# EAGLE board Main (EAGLE 9.6.2)
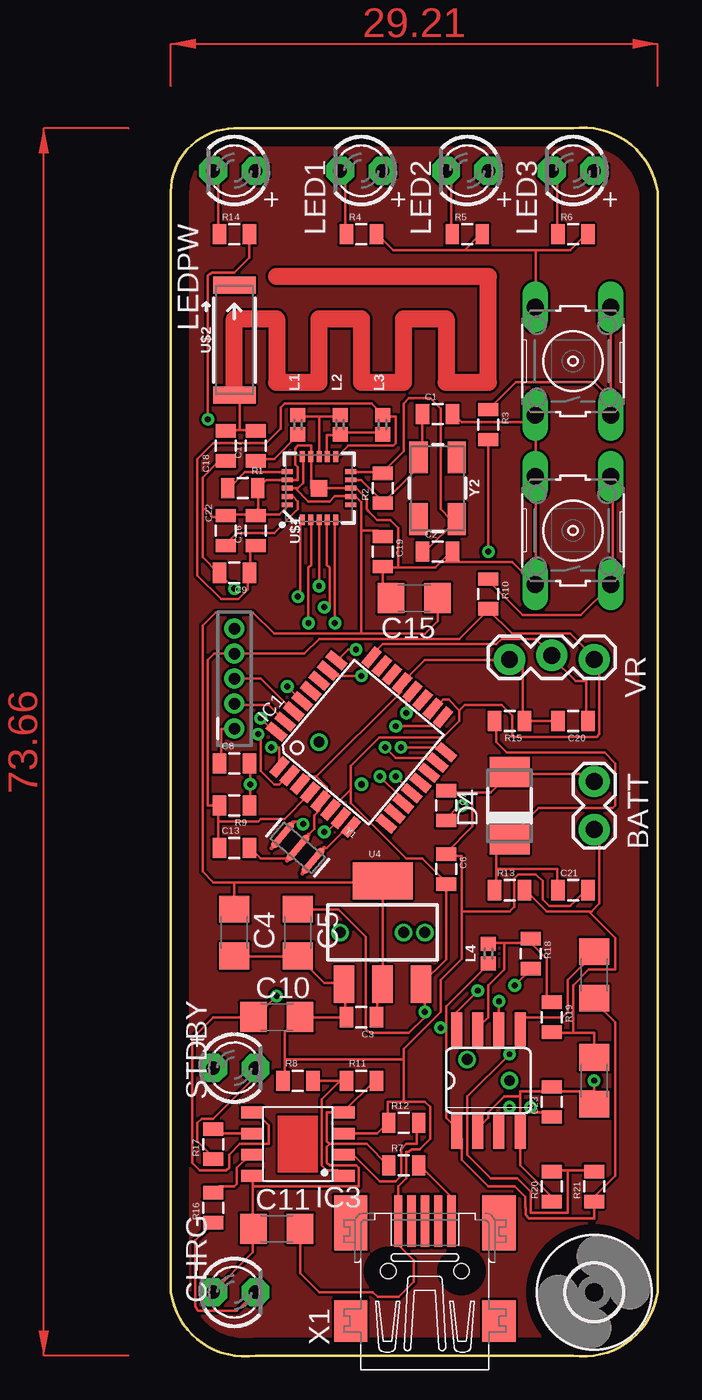
[diagram p0: board, top side]
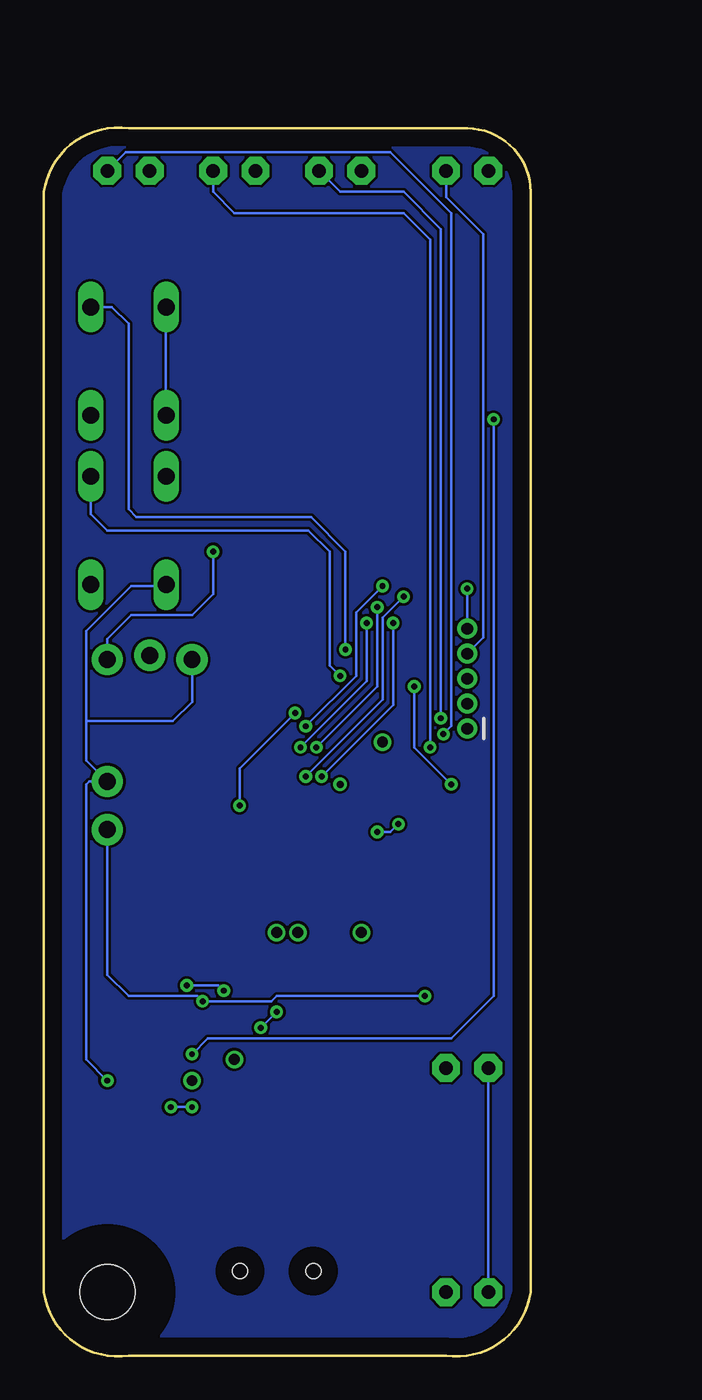
[diagram p1: board, bottom side, seen from below]

Size 29.21 x 73.74 mm. Coordinates in mm from the lower left corner, seen from the top.
Outline: 0,69.89 0,3.85 arc90 5.08,0.04 24.13,0.04 arc90 29.21,3.85 29.21,69.89 arc90 24.13,73.7 3.81,73.7 arc90 0,69.89
Copper layers (1*16): Top 0.035mm / dielectric 1.5mm / Bottom 0.035mm
Design rules "default": minimum track width 6mil, minimum drill 0.35mm, track to track 6mil, track to pad 6mil, pad to pad 6mil, via to via 6mil, smd to smd 6mil, copper to edge 40mil, drill to drill 6mil, minimum pad ring 10mil, minimum via ring 8mil, stop-mask expansion 4mil, vias tented up to drill 0mil, thermal gap 10mil
Net classes: 1 power: width 0.203 mm

## Footprints (pad centres in the part's own frame; a part is rotated, then mirrored left to right if it is on the bottom)
1X02_LOCK = drill 1.016 pad 1.88: 1 -0.178,0; 2 2.718,0
0805 = smd 0.8 x 1.2: 1 -0.9,0; 2 0.9,0
C1206 = smd 1.6 x 1.8: 1 -1.4,0; 2 1.4,0
LED3MM = drill 0.813 pad 1.676 octagon: A -1.27,0; K 1.27,0
DO-214AC = smd 1.8 x 2.4: A 2.025,0; C -2.025,0
3,3 = hole 3.3: 0,0
TQFP32-08 = smd 1.27 x 0.559: 1 -4.293,2.8; 2 -4.293,2; 3 -4.293,1.2; 4 -4.293,0.4; 5 -4.293,-0.4; 6 -4.293,-1.2; 7 -4.293,-2; 8 -4.293,-2.8; 17 4.293,-2.8; 18 4.293,-2; 19 4.293,-1.2; 20 4.293,-0.4; 21 4.293,0.4; 22 4.293,1.2; 23 4.293,2; 24 4.293,2.8 | smd 0.559 x 1.27: 9 -2.8,-4.293; 10 -2,-4.293; 11 -1.2,-4.293; 12 -0.4,-4.293; 13 0.4,-4.293; 14 1.2,-4.293; 15 2,-4.293; 16 2.8,-4.293; 25 2.8,4.293; 26 2,4.293; 27 1.2,4.293; 28 0.4,4.293; 29 -0.4,4.293; 30 -1.2,4.293; 31 -2,4.293; 32 -2.8,4.293
SOP-8 = smd 1.3 x 0.7: 1 -2.75,1.905; 2 -2.75,0.635; 3 -2.75,-0.635; 4 -2.75,-1.905; 5 2.75,-1.905; 6 2.75,-0.635; 7 2.75,0.635; 8 2.75,1.905
PIC_ICSP_MINI_5_PIN = drill 0.7: 1 -3,0; 2 -1.5,0; 3 0,0; 4 1.5,0; 5 3,0
0402 = smd 0.85 x 0.9: 1 -0.58,0; 2 0.58,0
B3F-10XX = drill 1.016 long: 1 -3.251,2.261; 2 3.251,2.261; 3 -3.251,-2.261; 4 3.251,-2.261
SOT223 = smd 1.219 x 2.235: 1 -2.311,-3.099; 2 0,-3.099; 3 2.311,-3.099 | smd 3.6 x 2.2: 4 0,3.099
QFN20-4X4MM = smd 1 x 1: 0 0,0 | smd 0.65 x 0.3: 1 -1.9,1; 2 -1.9,0.5; 3 -1.9,0; 4 -1.9,-0.5; 5 -1.9,-1; 11 1.9,-1; 12 1.9,-0.5; 13 1.9,0; 14 1.9,0.5; 15 1.9,1 | smd 0.3 x 0.65: 6 -1,-1.9; 7 -0.5,-1.9; 8 0,-1.9; 9 0.5,-1.9; 10 1,-1.9; 16 1,1.9; 17 0.5,1.9; 18 0,1.9; 19 -0.5,1.9; 20 -1,1.9
ANT-2.4GHZ-6.5X2.2MM = smd 1.016 x 2.54: FEED -3.302,0; NC 3.302,0
SO08 = smd 0.66 x 2.032: 1 -1.905,-3.073; 2 -0.635,-3.073; 3 0.635,-3.073; 4 1.905,-3.073; 5 1.905,3.073; 6 0.635,3.073; 7 -0.635,3.073; 8 -1.905,3.073
1X03_LOCK = drill 1.016 pad 1.88: 1 0,0.127; 2 2.54,-0.127; 3 5.08,0.127
32005-201 = smd 3.1 x 0.5: 1 3,1.6; 2 3,0.8; 3 3,0; 4 3,-0.8; 5 3,-1.6 | smd 2.5 x 2: M1 -3,-4.45; M2 -3,4.45 | smd 3.3 x 2: M3 2.9,4.45; M4 2.9,-4.45 | hole 0.9: 0,2.2; 0,-2.2
RESONATOR-SMD = smd 0.45 x 1.905: 1 -1.2,0; 2 0,0; 3 1.2,0
CRYSTAL-SMD-5X3.2-4PAD = smd 1.9 x 1.1: 1 -1.85,-1.15; 2 1.85,-1.15; 3 1.85,1.15; 4 -1.85,1.15

## Placement (x,y rotation side)
BATT  [1X02_LOCK]  25.4,31.79 90 top
C1  22p  [0805]  16,56.56 0 top
C2  22p  [0805]  16,48.3 0 top
C3  0.1uF  [0805]  11.43,20.36 180 top
C4  22uF  [C1206]  3.81,25.44 270 top
C5  4.7uF  [C1206]  7.62,25.44 270 top
C6  0.1uF  [0805]  16.51,29.25 270 top
C7  0.1uF  [0805]  16.51,33.06 270 top
C8  0.1uF  [0805]  3.81,35.6 0 top
C9  2.2nF  [0805]  3.81,47.03 180 top
C10  10uF  [C1206]  6.35,20.36 0 top
C11  10uF  [C1206]  6.35,7.66 0 top
C12  0.1mF  [C1206]  25.4,16.55 270 top
C13  0.1uF  [0805]  3.81,30.52 0 top
C14  0.22mF  [C1206]  25.4,22.9 90 top
C15  10uF  [C1206]  14.61,45.51 180 top
C16  4.7p  [0805]  5.08,49.57 90 top
C17  1.5p  [0805]  5.08,54.65 90 top
C18  10p  [0805]  3.3,54.65 270 top
C19  1nF  [0805]  12.7,48.3 270 top
C20  22p  [0805]  24.13,38.14 180 top
C21  0.1  [0805]  24.13,27.98 0 top
C22  1uF  [0805]  3.3,49.57 90 top
C23  1.5nF  [0805]  22.86,15.28 90 top
CHRG  PW  [LED3MM]  3.81,3.85 0 top
D4  SZ105B  [DO-214AC]  20.32,33.06 90 top
H1  MOUNT-HOLE3.3  [3,3]  25.4,3.85 0 top
IC1  MEGA8-AI  [TQFP32-08]  11.43,36.87 50 top
IC3  TP4056  [SOP-8]  7.62,12.74 180 top
J1  PIC_ICSP_MINI_5_PIN  [PIC_ICSP_MINI_5_PIN]  3.81,40.68 90 top
L1  3.9NH  [0402]  7.62,55.92 270 top
L2  8.2NH  [0402]  10.16,55.92 270 top
L3  2.7NH  [0402]  12.7,55.92 270 top
L4  100uH  [0402]  19.05,24.17 90 top
LED1  PW  [LED3MM]  11.43,71.16 180 top
LED2  PW  [LED3MM]  17.78,71.16 180 top
LED3  PW  [LED3MM]  24.13,71.16 180 top
LEDPW  PW  [LED3MM]  3.81,71.16 180 top
R1  1k  [0805]  4.32,52.11 0 top
R2  2k  [0805]  12.7,52.11 90 top
R3  10k  [0805]  19.05,55.92 270 top
R4  330  [0805]  11.43,67.35 0 top
R5  330  [0805]  17.78,67.35 0 top
R6  330  [0805]  24.13,67.35 0 top
R7  2.2k  [0805]  13.97,11.47 0 top
R8  2.2k  [0805]  7.62,16.55 0 top
R9  10k  [0805]  3.81,33.06 180 top
R10  10k  [0805]  19.05,45.76 270 top
R11  2.2k  [0805]  11.43,16.55 0 top
R12  2.2k  [0805]  13.97,14.01 0 top
R13  4.7k  [0805]  20.32,27.98 0 top
R14  1k  [0805]  3.81,67.35 0 top
R15  2.2k  [0805]  20.32,38.14 180 top
R16  102  [0805]  2.54,8.93 90 top
R17  102  [0805]  2.54,12.74 90 top
R18  180  [0805]  21.59,24.17 270 top
R19  0.22  [0805]  22.86,20.36 270 top
R20  2.2K  [0805]  22.86,10.2 90 top
R21  6.8K  [0805]  25.4,10.2 90 top
S1  SW1  [B3F-10XX]  24.13,59.73 90 top
S2  SW2  [B3F-10XX]  24.13,49.57 90 top
STDBY  PW  [LED3MM]  3.81,17.31 0 top
U4  LM1117 3.3  [SOT223]  12.7,25.44 0 top
U$1  NRF24L01SMD  [QFN20-4X4MM]  8.89,52.11 90 top
U$2  2.45GHz  [ANT-2.4GHZ-6.5X2.2MM]  3.81,61 90 top
U$3  MC33063/MC34063D  [SO08]  19.05,16.55 0 top
VR  [1X03_LOCK]  25.4,41.95 180 top
X1  MINI-USB-32005-201  [32005-201]  15.24,5.12 90 top
Y1  16MHZ  [RESONATOR-SMD]  7.62,30.52 320 top
Y2  [CRYSTAL-SMD-5X3.2-4PAD]  16,52.11 270 top

## Library data of the parts
BATT VR = SparkFun
C1-C3 C6-C9 C13 C16-C23 = SparkFun-Passives
C4 C5 C10-C12 C14 C15 CHRG LED1-LED3 LEDPW STDBY U$3 = adafruit
D4 = diode
H1 = holes
IC1 = atmel; MPN: ATMEGA8-16AU; OC_FARNELL: 9171371; OC_NEWARK: 73M8863
IC3 = TP4056
J1 = SparkFun-Connectors; PROD_ID: CONN-08314; SF_ID: PRT-11264
L1-L4 = SparkFun-Coils; PROD_ID: NDUC-13457
R1-R21 = SparkFun-Resistors
S1 S2 = switch-omron; MPN: B3F-1000; OC_FARNELL: 176432; OC_NEWARK: 36M3542
U4 = SparkFun-PowerIC; PROD_ID: VREG-08170
U$1 = SparkFun-RF; PROD_ID: IC-08950; SF_ID: COM-00690
U$2 = SparkFun-RF; PROD_ID: ANT-08187; SF_ID: WRL-00144
X1 = con-cypressindustries; OC_FARNELL: unknown; OC_NEWARK: unknown
Y1 = SparkFun-FreqCtrl; PROD_ID: XTAL-08900
Y2 = SparkFun-Clocks

## Nets
3.3V: C3.1 C4.1 C15.1 C19.1 U4.2 U4.4 U$1.7 U$1.15 U$1.18
A0: C21.1 D4.C R13.1 R15.2
A1: C20.1 IC1.24 VR.2
A2: IC1.25 R3.1 S1.3 S1.4
A3: IC1.26 R10.1 S2.3 S2.4
BATT_IN: BATT.1 C10.1 C12.1 IC3.5 R13.2 R19.2 U$3.6
CS: IC1.14
D2: IC1.32 LED1.A
D3: IC1.1 LED2.A
D4: IC1.2 LED3.A
D5: IC1.9
D6: IC1.10
D7: IC1.11 U$1.2
D8: IC1.12 U$1.1
D9: IC1.13
GND: BATT.2 C1.2 C2.2 C3.2 C4.2 C5.2 C6.1 C7.1 C9.2 C10.2 C11.2 C12.2 C13.2 C15.2 C16.2 C18.2 C19.2 C20.2 C21.2 C22.2 C23.2 D4.A IC1.3 IC1.5 IC1.21 IC3.3 J1.5 R1.2 R4.2 R5.2 R6.2 R8.1 R12.1 R15.1 R20.1 S1.1 S1.2 S2.1 S2.2 U4.1 U$1.0 U$1.8 U$1.14 U$1.17 U$1.20 U$3.2 U$3.4 VR.3 X1.1 Y1.2
IRQ: U$1.6
MISO: IC1.16 U$1.5
MOSI: IC1.15 U$1.4
N$1: LED1.K R4.1
N$2: LED2.K R5.1
N$3: LED3.K R6.1
N$4: C17.1 L1.2
N$5: IC1.8 Y1.3
N$7: IC1.7 Y1.1
N$8: C7.2 IC1.20
N$9: C8.1 J1.1
N$11: IC1.23
N$12: LEDPW.K R14.1
N$13: IC3.7 R16.2
N$14: L1.1 L2.1 U$1.13
N$15: L2.2 L3.2 U$1.12
N$16: C9.1 C16.1 L3.1 U$1.11
N$17: C22.1 U$1.19
N$18: R1.1 U$1.16
N$19: C17.2 C18.1 U$2.FEED
N$20: C1.1 R2.1 U$1.9 Y2.1
N$21: C2.1 R2.2 U$1.10 Y2.3
N$22: IC3.6 R17.2
N$23: R17.1 STDBY.K
N$24: CHRG.K R16.1
N$25: C11.1 CHRG.A IC3.4 IC3.8 R7.1 R11.2 STDBY.A
N$26: C14.2 R14.2 R20.2 R21.2 U$3.5
N$27: IC3.2 R12.2
N$28: C23.1 U$3.3
N$29: IC3.1 R8.2 R11.1
N$30: R7.2 X1.5
N$34: R18.2 U$3.8
N$35: L4.2 R18.1 R19.1 U$3.7
RST: C8.2 IC1.29 R9.1
RXD: IC1.30 J1.3
SCK: IC1.17 U$1.3
SCL: IC1.28
SDA: IC1.27
TXD: IC1.31 J1.2
VCC: C5.1 C6.2 C13.1 C14.1 IC1.4 IC1.6 IC1.18 J1.4 L4.1 LEDPW.A R3.2 R9.2 R10.2 R21.1 U4.3 U$3.1 VR.1

## Tracks (layer width: path | path; a pad name or v marks a point on that pad's centre or on a via)
3.3V
  Top 0.152: 7.46,52.11 7.62,52.11 7.94,52.43 7.94,53.86 U$1.15 | 7.46,52.11 U$1.18 | 7.46,52.11 8.26,51.32 9.53,51.32 9.84,51.63 10.64,51.63 U$1.7 11.09,51.61 11.43,51.27 11.43,49.57 | C19.1 12.7,49.25 12.38,49.57 11.43,49.57 | 15.88,45.44 C15.1 16,44.13 15.24,43.37 15.09,43.37 15.08,43.38 11.43,43.38 | C3.1 12.38,20.36 12.38,22.27 12.7,22.27 U4.2 12.7,28.46 | 12.7,28.46 3.81,28.46 | 3.81,26.87 C4.1 3.81,28.46 | 12.7,28.46 U4.4 | 3.81,28.46 2.54,28.46 1.91,29.09 1.91,43.86 2.7,44.65 4.92,44.65 6.19,43.38 11.43,43.38 | 11.43,49.57 11.43,43.38
A0
  Top 0.152: 19.53,29.25 19.53,31 20.32,31 D4.C 20.32,31.16 22.07,32.9 26.51,32.9 26.67,33.06 26.67,35.6 26.04,36.24 20.16,36.24 19.53,36.87 19.53,38.14 R15.2 | 19.53,29.25 19.53,27.98 R13.1 | C21.1 23.18,27.98 23.18,29.25 19.53,29.25
A1
  Top 0.152: C20.1 24.92,38.14 24.92,40.52 24.29,40.52 22.86,41.95 VR.2 22.86,42.11 21.91,43.06 19.84,43.06 19.53,42.74 12.7,42.74 12.06,42.11 IC1.24
A2  (via drill 0.35)
  Top 0.152: 19.05,56.87 R3.1 20.69,58.46 25.4,58.46 26.35,57.51 26.35,56.56 S1.3 S1.4 26.35,62.91 | v11.11,42.43 10.64,42.43 10,41.79 IC1.25
  Bottom 0.152: v11.11,42.43 11.11,48.3 13.18,50.36 23.65,50.36 24.13,50.84 24.13,61.99 25.12,62.98 S1.4
A3  (via drill 0.35)
  Top 0.152: R10.1 19.05,46.55 21.11,44.49 24.61,44.49 26.35,46.24 S2.3 26.51,46.4 26.51,52.75 S2.4 | v11.43,40.84 9.84,40.84 9.53,41.16 IC1.26
  Bottom 0.152: S2.4 26.39,50.56 25.4,49.57 13.33,49.57 12.06,48.3 12.06,41.47 v11.43,40.84
B
  pour Bottom: 0,69.89 arc-90 3.81,73.7 25.4,73.7 arc-90 29.21,69.89 29.21,3.85 arc-90 25.4,0.04 3.81,0.04 arc-90 0,3.85
BATT_IN  (via drill 0.35)
  Top 0.152: 25.08,26.71 25.24,26.71 25.72,27.19 25.72,31.47 25.4,31.47 BATT.1 | 25.08,26.71 22.54,26.71 21.27,27.98 R13.2 | v6.35,21.63 5.08,20.36 C10.1 2.54,20.36 1.27,19.09 1.27,11.63 1.75,11.15 3.33,11.15 3.49,11.31 3.49,12.11 4.13,12.74 5.87,12.74 5.87,13.85 5.08,14.65 IC3.5 | 24.13,19.41 25.4,19.41 C12.1 | 24.13,19.41 22.86,19.41 R19.2 | v19.68,21.31 U$3.6 | 24.13,19.41 24.13,22.27 25.08,23.22 26.67,23.22 26.67,25.12 25.08,26.71
  Bottom 0.152: v6.35,21.63 15.24,21.63 15.56,21.31 v19.68,21.31 20,21.63 24.13,21.63 25.4,22.9 BATT.1
D2  (via drill 0.35)
  Top 0.152: v5.4,38.3 6.19,37.51 IC1.32
  Bottom 0.152: v5.4,38.3 5.4,67.67 7.62,69.89 11.43,69.89 LED1.A
D3  (via drill 0.35)
  Top 0.152: v6.03,36.55 6.51,36.55 6.51,35.44 IC1.1
  Bottom 0.152: v6.03,36.55 6.03,67.03 7.62,68.62 17.78,68.62 19.05,69.89 LED2.A
D4  (via drill 0.35)
  Top 0.152: v5.24,37.35 5.4,37.35 5.4,35.12 6.19,34.33 6.51,34.33 6.98,34.81 IC1.2
  Bottom 0.152: v5.24,37.35 4.76,37.82 4.76,68.62 8.41,72.27 24.29,72.27 LED3.A
D7  (via drill 0.35)
  Top 0.152: v8.26,44.01 8.26,47.35 8.41,47.51 8.41,50.21 U$1.2 | v12.54,34.81 13.81,33.54 13.81,33.22 IC1.11
  Bottom 0.152: v8.26,44.01 8.26,39.09 v12.54,34.81
D8  (via drill 0.35)
  Top 0.152: v7.62,45.6 7.78,45.6 7.78,50.21 U$1.1 | v13.49,34.81 14.45,33.85 IC1.12
  Bottom 0.152: v7.62,45.6 8.89,44.33 8.89,39.41 v13.49,34.81
GND  (via drill 0.35)
  Top 0.152: 5.24,52.11 5.71,52.59 6.98,52.59 U$1.17 7.14,52.59 7.62,52.59 7.62,53.38 7.46,53.54 7.46,54.49 7.62,54.65 8.41,54.65 8.41,54.02 U$1.14 8.41,53.86 8.41,52.11 U$1.0 U$1.8 11.11,52.11 11.75,51.48 11.75,50.84 11.87,50.72 12.38,50.21 13.18,50.21 13.65,49.73 13.65,47.35 | 5.08,50.52 5.24,50.52 | 5.24,50.52 6.51,50.52 6.98,51 U$1.20 | 5.24,50.52 5.24,52.11 | 5.24,52.11 R1.2 | 5.24,50.52 C16.2 5.08,50.52 | 2.86,47.03 1.91,47.98 1.91,50.84 | C18.2 3.17,53.7 2.86,53.7 1.91,52.75 1.91,50.84 | 2.86,47.03 v3.81,46.08 | 2.86,47.03 C9.2 | 5.08,50.52 3.33,50.52 C22.2 3.17,50.36 2.54,50.36 2.06,50.84 1.91,50.84 | 17.62,66.4 13.33,66.4 12.38,67.35 R4.2 | 17.62,66.4 18.57,67.35 R5.2 | 17.62,66.4 21.91,66.4 | 21.91,66.4 23.97,66.4 24.92,67.35 R6.2 | 21.91,66.4 21.91,63.06 S1.2 | C1.2 16.99,56.56 17.46,56.08 21.75,56.08 21.87,55.96 | 12.7,47.35 12.7,45.6 13.18,45.6 C15.2 | 16.19,47.67 15.88,47.35 13.65,47.35 | 16.19,47.67 16.83,48.3 C2.2 | 12.7,47.35 13.65,47.35 | 12.7,47.35 C19.2 | 16.19,47.67 20.48,47.67 21.75,46.4 S2.1 21.91,46.4 21.91,52.75 S2.2 21.91,52.9 21.91,55.92 21.87,55.96 | 13.65,7.98 13.65,6.69 14.58,5.76 14.58,4.48 13.68,3.58 12.4,3.58 12.13,3.85 8.89,3.85 7.75,4.99 C11.2 7.78,7.66 | 13.65,7.98 X1.1 13.65,8.14 | 7.62,24.01 3.81,24.01 C4.2 | 10.48,20.36 10.48,22.27 U4.1 10.32,22.42 9.21,22.42 7.62,24.01 | 13.02,14.01 12.38,13.38 IC3.3 | 6.83,17.82 6.83,19.44 C10.2 10.48,20.36 | 6.83,17.82 6.83,16.55 R8.1 | 13.02,14.01 13.02,15.28 13.97,15.28 | 13.02,14.01 R12.1 | 10.48,20.36 C3.2 | 7.62,24.01 C5.2 | 13.65,8.14 13.65,10.2 14.13,10.68 14.13,12.26 14.29,12.26 14.45,12.42 14.92,12.42 15.56,13.06 15.56,14.96 15.24,15.28 13.97,15.28
  Top 0.152: 18.1,33.85 18.1,31.79 16.51,30.2 C6.1 16.51,30.04 17.46,30.04 17.46,26.71 | 18.1,33.85 16.51,33.85 C7.1 | C21.2 24.92,27.98 23.97,27.03 22.7,27.03 22.3,27.42 22.3,28.54 21.91,28.93 20.85,28.93 20.59,28.68 20.59,26.98 20.32,26.71 17.46,26.71 | 20.32,34.97 19.21,33.85 18.1,33.85 | 20.32,34.97 25.08,34.97 25.4,34.65 BATT.2 | 20.32,34.97 D4.A | C13.2 4.76,30.52 5.4,29.89 6.98,29.89 Y1.2 8.24,31.29 | IC1.5 8.89,33.22 8.89,32.77 8.6,32.48 8.6,31.66 8.24,31.29 | 8.26,31.31 8.24,31.29 | 8.73,34.81 8.1,34.81 7.78,34.49 IC1.3 | 8.73,34.81 9.37,34.17 9.37,33.71 IC1.5 | 9.05,33.38 IC1.5 | C20.2 R15.1 21.11,38.14 21.11,41.79 20.32,41.79 | 20.32,41.79 15.24,41.79 13.97,40.52 IC1.21 13.81,40.36 13.81,39.89 8.73,34.81 | 20.32,41.79 VR.3 | 17.46,26.71 17.46,23.85 16.19,22.58 16.19,20.68 13.97,18.46 13.97,17.82 | 25.4,15.92 22.86,15.92 | 25.4,15.92 C12.2 25.4,15.28 | R20.1 22.86,9.57 20.95,11.47 U$3.4 20.95,15.6 | 20.95,15.6 20,15.6 19.05,14.65 19.05,14.33 18.41,13.69 U$3.2 | 22.86,15.92 20.95,15.92 20.95,15.6 | 22.86,15.92 C23.2 | v25.4,16.55 25.4,15.92 | S1.1 21.87,55.96 | 13.65,7.98 13.65,8.14 | 13.97,15.28 13.97,17.82 | 6.83,17.82 13.97,17.82
  Bottom 0.152: v3.81,46.08 J1.5 | S1.2 21.91,62.91 21.91,56.56 S1.1 | 26.67,38.14 26.67,35.78 BATT.2 26.49,34.51 26.67,34.33 26.67,17.82 v25.4,16.55 | 26.67,38.14 26.67,43.54 23.97,46.24 21.91,46.24 S2.1 | VR.3 20.32,39.28 21.46,38.14 26.67,38.14
MISO  (via drill 0.35)
  Top 0.152: v9.84,44.01 9.84,50.21 U$1.5 | v13.81,36.55 16.35,36.55 16.51,36.39 IC1.16
  Bottom 0.152: v9.84,44.01 9.84,40.52 v13.81,36.55
MOSI  (via drill 0.35)
  Top 0.152: v9.21,44.97 9.53,44.97 9.53,47.35 9.37,47.51 9.37,50.21 U$1.4 | v12.86,36.55 13.49,35.92 15.72,35.92 15.88,35.76 IC1.15
  Bottom 0.152: v9.21,44.97 9.21,40.2 v12.86,36.55
N$1
  Top 0.152: LED1.K 10.48,71.16 10.48,67.35 R4.1
N$2
  Top 0.152: LED2.K 16.83,71.16 16.83,67.35 R5.1
N$3
  Top 0.152: LED3.K 23.18,71.16 23.18,67.35 R6.1
N$4
  Top 0.152: L1.2 7.62,55.29 6.19,53.86 5.08,53.86 C17.1
N$5
  Top 0.152: 10.57,31.78 IC1.8 10.64,31.79 9.37,30.52 9.21,30.52 Y1.3
N$7  (via drill 0.35)
  Top 0.152: 7.32,31.91 Y1.1 7.46,32.11 7.78,32.11 v7.94,31.95 | v9.21,31.47 9.37,31.47 10.16,32.27 IC1.7
  Bottom 0.152: v9.21,31.47 8.41,31.47 v7.94,31.95
N$8  (via drill 0.35)
  Top 0.152: v17.46,33.06 17.3,33.06 16.51,32.27 C7.2 | IC1.20 14.13,39.53 v14.13,38.62
  Bottom 0.152: v17.46,33.06 17.46,35.28 v14.13,38.62
N$9
  Top 0.152: C8.1 3.02,35.6 3.02,37.66 3.81,37.66 J1.1
N$12
  Top 0.152: LEDPW.K 2.86,71.16 2.86,67.35 R14.1
N$13
  Top 0.152: IC3.7 4.76,12.11 3.97,11.31 3.97,10.36 3.81,10.2 2.91,10.2 R16.2
N$14
  Top 0.152: 8.89,56.4 U$1.13 | 8.89,56.4 7.62,56.4 L1.1 | 8.89,56.4 10.16,56.4 L2.1
N$15
  Top 0.152: U$1.12 9.37,54.02 9.37,55.29 10.16,55.29 L2.2 10.16,55.44 12.7,55.44 L3.2
N$16
  Top 0.152: C16.1 5.08,48.62 4.76,48.62 4.76,47.03 C9.1 4.6,47.03 4.6,46.01 4.03,45.44 3.02,45.44 1.59,46.87 1.59,53.86 2.54,54.81 5.71,54.81 6.59,55.68 6.59,56.95 6.83,57.19 12.06,57.19 12.7,56.56 L3.1 12.7,56.4 13.49,56.4 13.49,54.81 13.33,54.65 10.64,54.65 10,54.02 U$1.11
N$17
  Top 0.152: U$1.19 7.14,51.63 7.3,51.63 7.62,51.32 7.62,50.84 6.19,49.41 3.97,49.41 3.33,48.78 C22.1
N$18
  Top 0.152: U$1.16 6.98,53.06 4.45,53.06 3.49,52.11 R1.1
N$19
  Top 0.152: 4.13,55.6 5.08,55.6 C17.2 | 4.13,55.6 3.33,55.6 C18.1 | 4.13,55.6 4.13,57.35 U$2.FEED
  Top 1.016: U$2.FEED 3.81,62.27 6.35,62.27 6.35,58.46 8.89,58.46 8.89,62.27 11.43,62.27 11.43,58.46 13.97,58.46 13.97,62.27 16.51,62.27 16.51,58.46 19.05,58.46 19.05,64.81 6.35,64.81
N$20
  Top 0.152: 12.54,51.48 12.7,51.32 R2.1 | 12.54,51.48 11.43,52.59 10.79,52.59 U$1.9 | 15.08,54.02 15.08,56.56 C1.1 | 15.08,54.02 14.92,54.02 Y2.1 14.92,53.86 | 12.54,51.48 R2.1 | R2.1 13.6,52.11 | 15.08,54.02 15.08,53.59 R2.1
N$21
  Top 0.152: 12.7,53.06 10.79,53.06 U$1.10 | C2.1 15.24,48.3 17.14,50.21 Y2.3 16.77,50.26 16.19,50.84 16.19,56.87 15.56,57.51 14.29,57.51 13.97,57.19 13.97,54.33 12.7,53.06 | 12.7,53.06 R2.2
N$22
  Top 0.152: IC3.6 2.7,13.38 2.54,13.53 R17.2
N$23
  Top 0.152: R17.1 2.54,11.95 1.59,12.9 1.59,14.01 1.84,14.27 2.54,14.27 5.08,16.81 STDBY.K
N$24
  Top 0.152: R16.1 1.47,6.96 1.47,3.02 1.52,2.92 1.6,2.79 1.65,2.74 3.97,2.74 CHRG.K
N$25
  Top 0.152: 9.53,12.74 11.75,12.74 13.02,11.47 R7.1 | 9.53,12.74 9.37,12.9 9.37,14.65 10.32,14.65 | 10.32,14.65 12.22,16.55 R11.2 | 10.32,14.65 IC3.4 | 4.92,7.66 4.92,10.2 | 4.92,10.2 4.92,10.84 IC3.8 | 4.92,7.66 C11.1 | 9.53,12.74 9.37,12.58 9.37,11.63 9.53,11.47 11.11,11.47 11.27,11.31 11.27,10.2 4.92,10.2 | 4.92,7.66 4.92,6.23 CHRG.A
  Bottom 0.152: CHRG.A STDBY.A
N$26  (via drill 0.35)
  Top 0.152: 23.81,11.15 25.4,11.15 R21.2 | 23.81,11.15 22.86,11.15 R20.2 | C14.2 25.4,24.17 23.81,22.58 23.81,20.68 23.5,20.36 20.95,20.36 U$3.5 20.95,18.77 v20.32,18.14 17.78,15.6 17.78,12.11 19.21,10.68 20.8,10.68 21.59,9.88 21.59,8.61 23.81,8.61 23.81,11.15 | v2.22,56.24 2.22,64.86 2.35,65 2.4,65 2.45,65.04 2.54,65.04 3.81,65.04 4.71,65.94 R14.2
  Bottom 0.152: v2.22,56.24 2.22,21.63 4.76,19.09 19.37,19.09 v20.32,18.14
N$27
  Top 0.152: IC3.2 10.95,12.11 12.54,10.52 13.49,10.52 13.81,10.84 13.81,12.42 14.13,12.74 14.76,12.74 14.76,14.01 R12.2
N$28  (via drill 0.35)
  Top 0.152: v21.59,14.96 21.59,14.65 22.86,14.65 C23.1 | v20.32,14.96 19.68,14.33 U$3.3
  Bottom 0.152: v20.32,14.96 v21.59,14.96
N$29
  Top 0.152: R11.1 10.16,16.55 | 10.16,16.55 9.05,16.55 R8.2 | IC3.1 10.32,10.84 10,11.15 9.37,11.15 9.05,11.47 9.05,15.28 9.05,15.44 10.16,16.55
N$30
  Top 0.152: R7.2 14.92,11.47 16.83,9.57 16.83,8.14 X1.5
N$34  (via drill 0.35)
  Top 0.152: v20.64,22.27 21.59,23.22 R18.2 | v18.41,21.95 17.14,20.68 U$3.8
  Bottom 0.152: v18.41,21.95 18.73,22.27 v20.64,22.27
N$35
  Top 0.152: 21.59,24.81 20,24.81 | 20,24.81 19.05,24.81 L4.2 | 21.59,24.81 22.54,23.85 22.54,21.63 22.86,21.31 R19.1 | 21.59,24.81 R18.1 | 20,24.81 20,23.22 19.05,22.27 19.05,20.36 18.41,19.73 U$3.7
N$36  (via drill 0.65)
  other vias: 17.78,17.82
N$37  (via drill 0.65)
  other vias: 20.32,16.55
N$38  (via drill 0.65)
  other vias: 10.16,25.44
N$39  (via drill 0.65)
  other vias: 15.24,25.44
N$40  (via drill 0.65)
  other vias: 13.97,25.44
N$41  (via drill 0.65)
  other vias: 8.89,36.87
N$42  (via drill 0.4)
  other vias: 11.43,34.33
RST  (via drill 0.35)
  Top 0.152: R9.1 4.76,33.06 v4.76,34.33 4.76,35.6 C8.2 | v6.98,40.2 7.78,39.41 IC1.29
  Bottom 0.152: v6.98,40.2 6.98,36.55 v4.76,34.33
RXD
  Top 0.152: J1.3 5.4,40.68 7.3,38.78 IC1.30
SCK  (via drill 0.35)
  Top 0.152: v8.89,46.24 U$1.3 | v13.49,37.82 15.72,37.82 16.19,38.3 IC1.17
  Bottom 0.152: v8.89,46.24 10.48,44.65 10.48,40.84 v13.49,37.82
T
  pour Top: 0,69.89 arc-90 3.81,73.7 24.13,73.7 25.4,73.7 arc-90 29.21,69.89 29.21,5.12 29.21,3.85 arc-90 25.4,0.04 3.81,0.04 2.54,0.04 arc-90 0,2.58
TXD
  Top 0.152: IC1.31 6.83,38.14 5.87,39.09 3.81,39.09 J1.2
VCC  (via drill 0.35)
  Top 0.152: 10,33.22 9.68,32.9 IC1.6 10,33.22 10.79,34.02 | 10.79,33.22 11.19,32.82 14.13,29.89 15.08,29.89 16.51,28.46 C6.2 16.51,23.84 U4.3 15.08,22.42 15.24,22.42 v15.24,20.68 15.24,20.36 14.29,19.41 11.96,19.41 11.7,19.67 11.7,25.17 10.03,26.84 C5.1 | 17.3,38.78 16.67,39.41 16.35,39.41 15.88,38.93 IC1.18 | 17.3,38.78 17.3,38.14 16.32,37.16 12.51,37.16 10.79,35.44 10.79,34.02 | 10.79,33.22 10.79,34.02 | 2.86,33.06 2.86,32.11 | 2.86,32.11 2.86,30.52 C13.1 | 2.86,32.11 5.24,32.11 5.4,32.27 6.83,32.27 8.26,33.7 IC1.4 | 2.86,33.06 2.22,33.06 2.22,41.79 2.61,42.18 J1.4 8.01,42.18 8.89,43.06 17.3,43.06 19.05,44.81 | 2.86,33.06 R9.2 | 19.05,44.81 20.48,43.38 23.97,43.38 25.4,41.95 VR.1 25.4,41.79 25.72,41.79 25.72,37.35 25.56,37.19 20.48,37.19 20.48,38.46 19.84,39.09 17.62,39.09 17.3,38.78 | v19.05,48.3 R3.2 | 19.05,44.81 R10.2 | 16.51,19.73 16.51,14.33 17.14,13.69 U$3.1 17.14,13.38 17.46,13.06 17.46,11.79 19.05,10.2 20.64,10.2 21.27,9.57 21.27,8.93 21.29,8.92 21.29,8.49 21.48,8.3 25.4,8.3 R21.1 25.4,9.57 26.67,10.84 26.67,20.04 25.4,21.31 C14.1 | 16.51,19.73 16.51,21 19.05,23.54 L4.1 | v16.19,19.73 16.51,19.73 | 10.79,33.22
  Bottom 0.152: VR.1 25.4,43.07 23.98,44.49 20.32,44.49 19.05,45.76 v19.05,48.3 | LEDPW.A 5.08,69.57 2.86,67.35 2.86,43.13 J1.4 | v15.24,20.68 v16.19,19.73
(copper drawn outside any net)
  shapes: Top area x2